# Altium PCB PCB1.PcbDoc
Units mil, origin at the board's own origin, x right, y up, seen from the top; angles counter-clockwise.
Board outline 1500 x 1080 mil, 2 copper layers (Top Layer, Bottom Layer); 17 components, 4 nets, 60 pads, 0 vias.
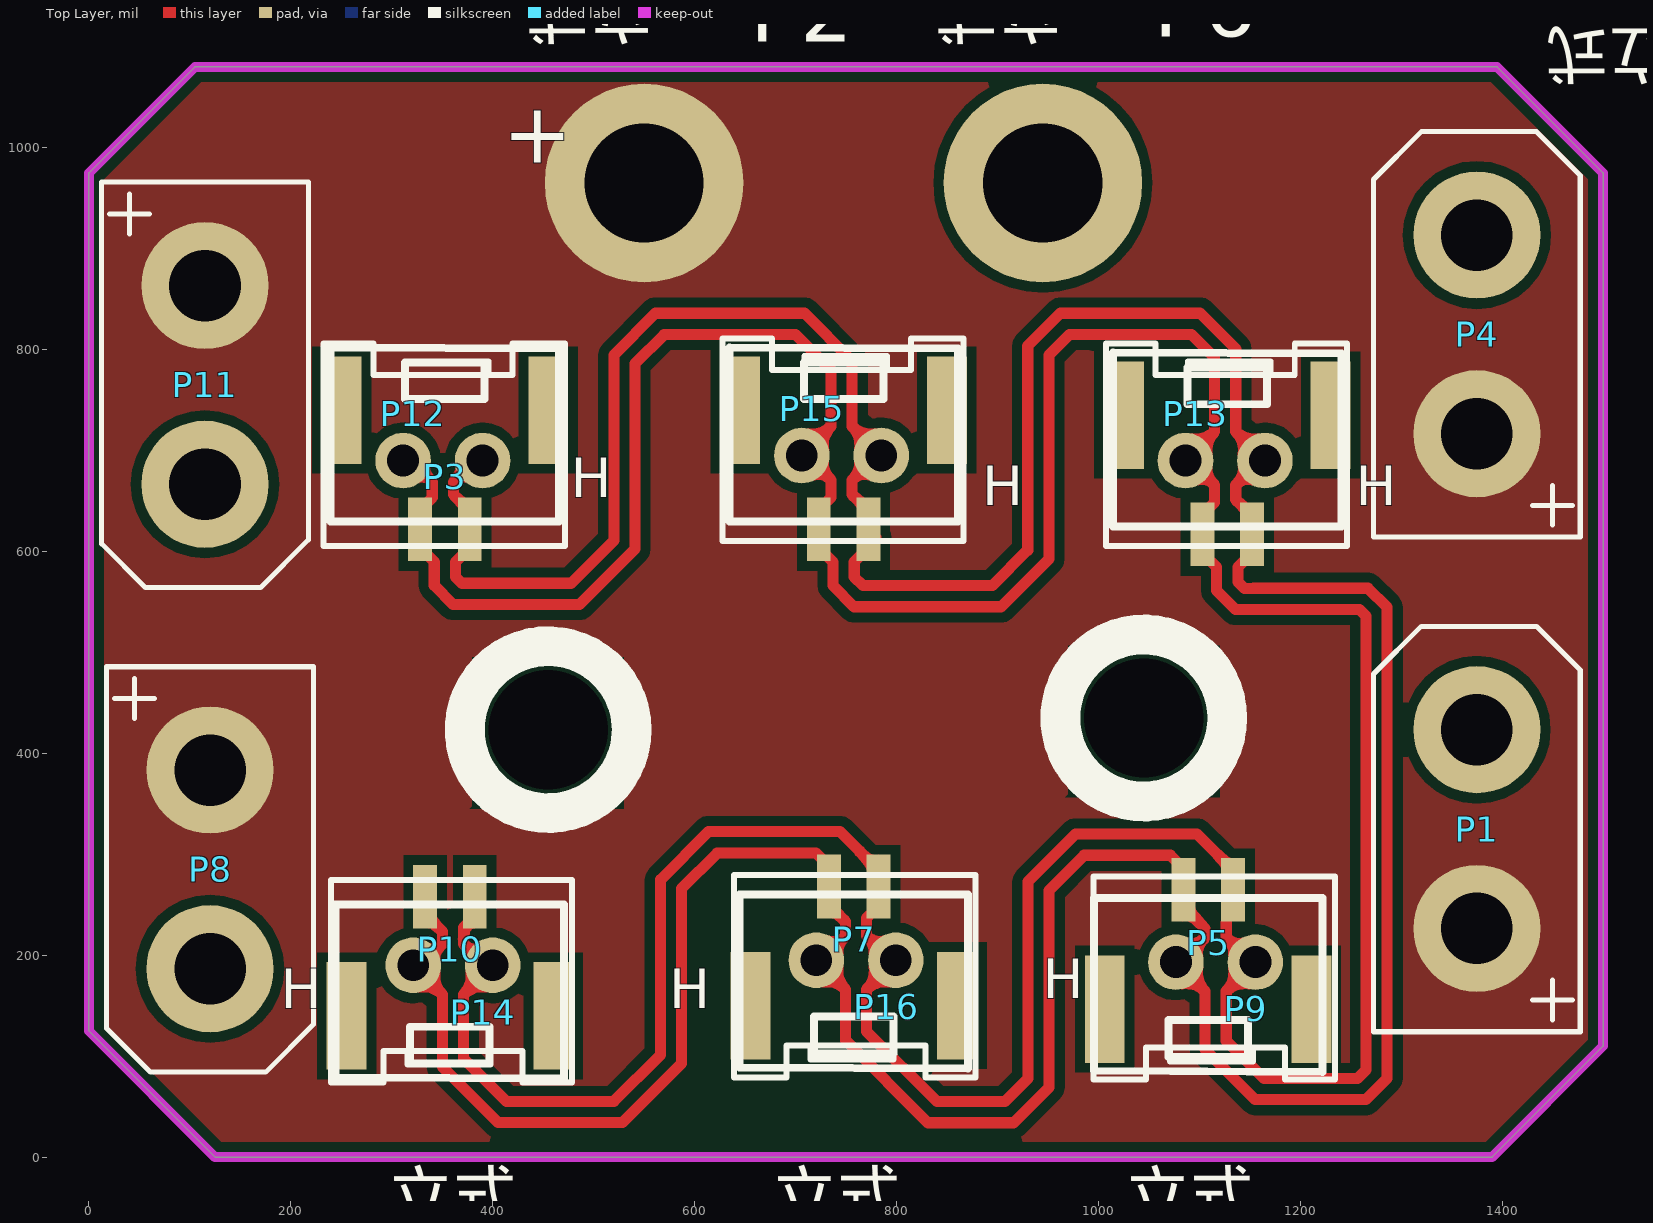
[diagram p0: Top Layer view]
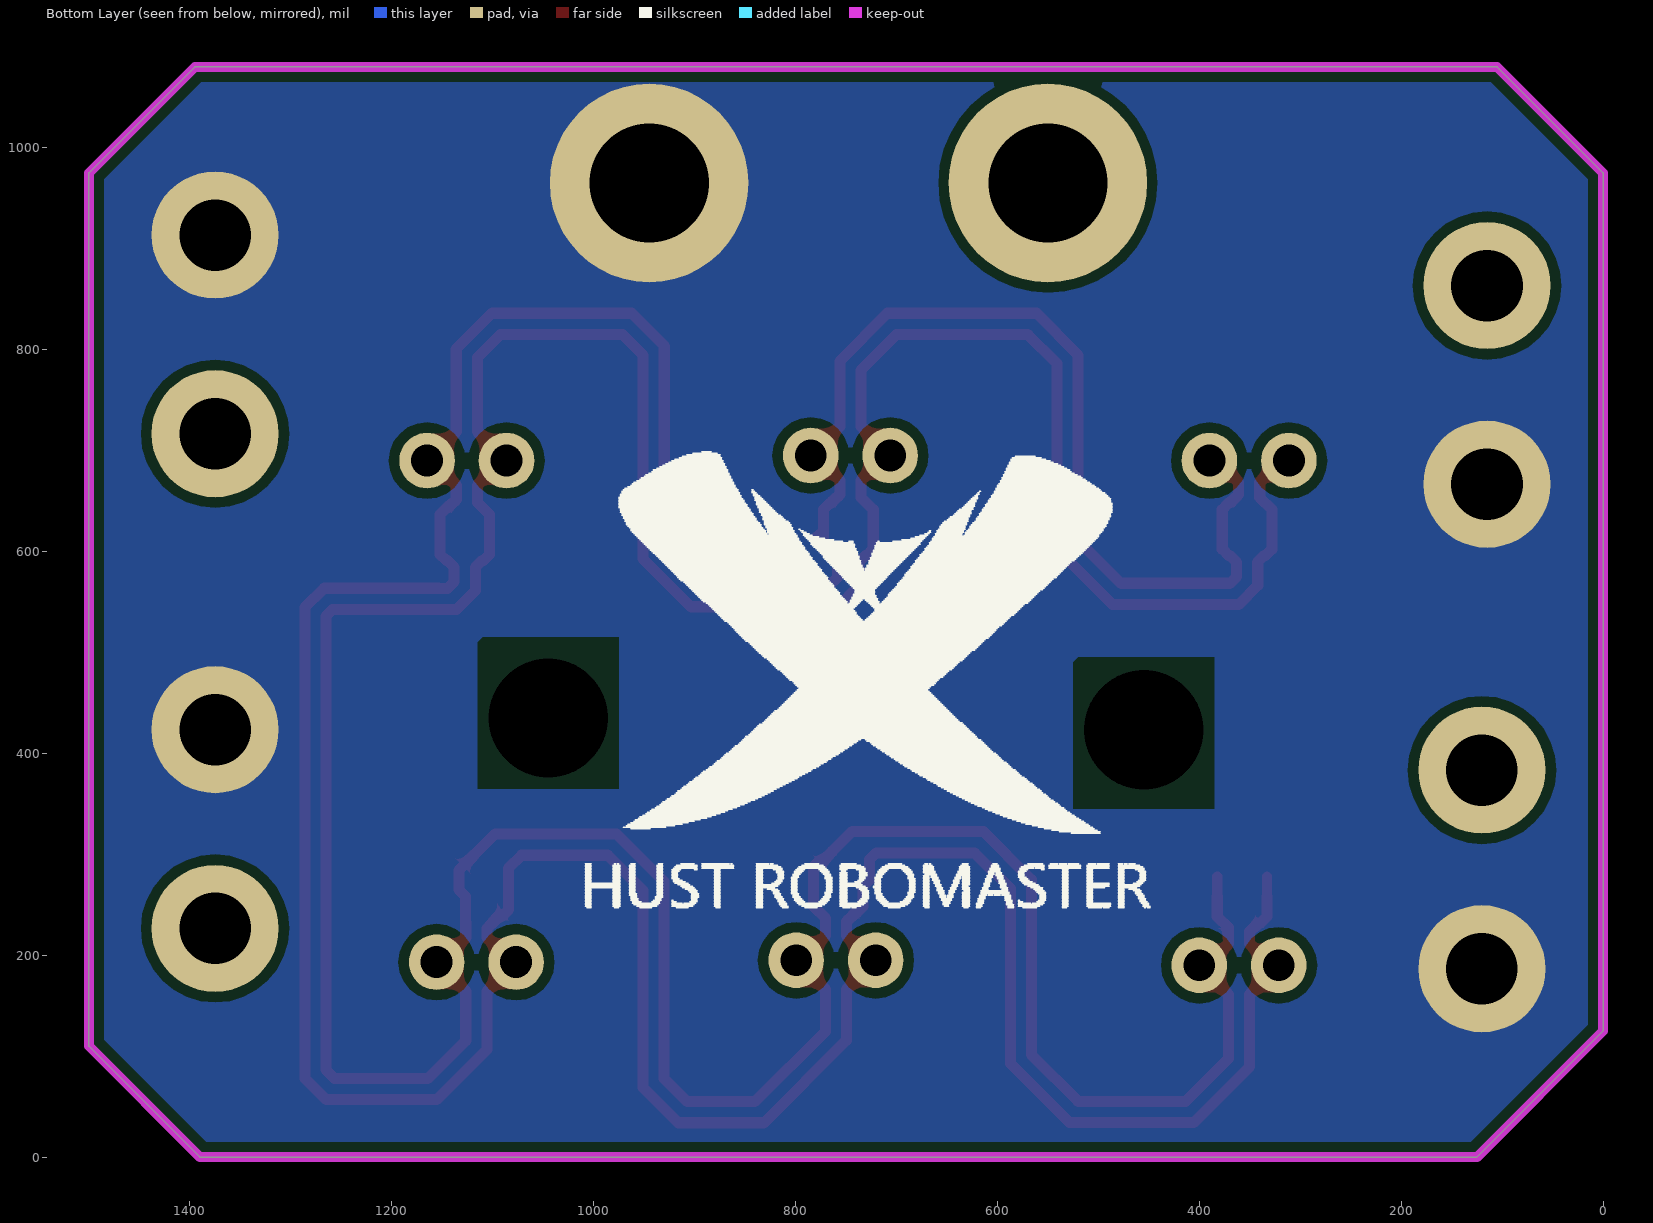
[diagram p1: Bottom Layer view, seen from below]
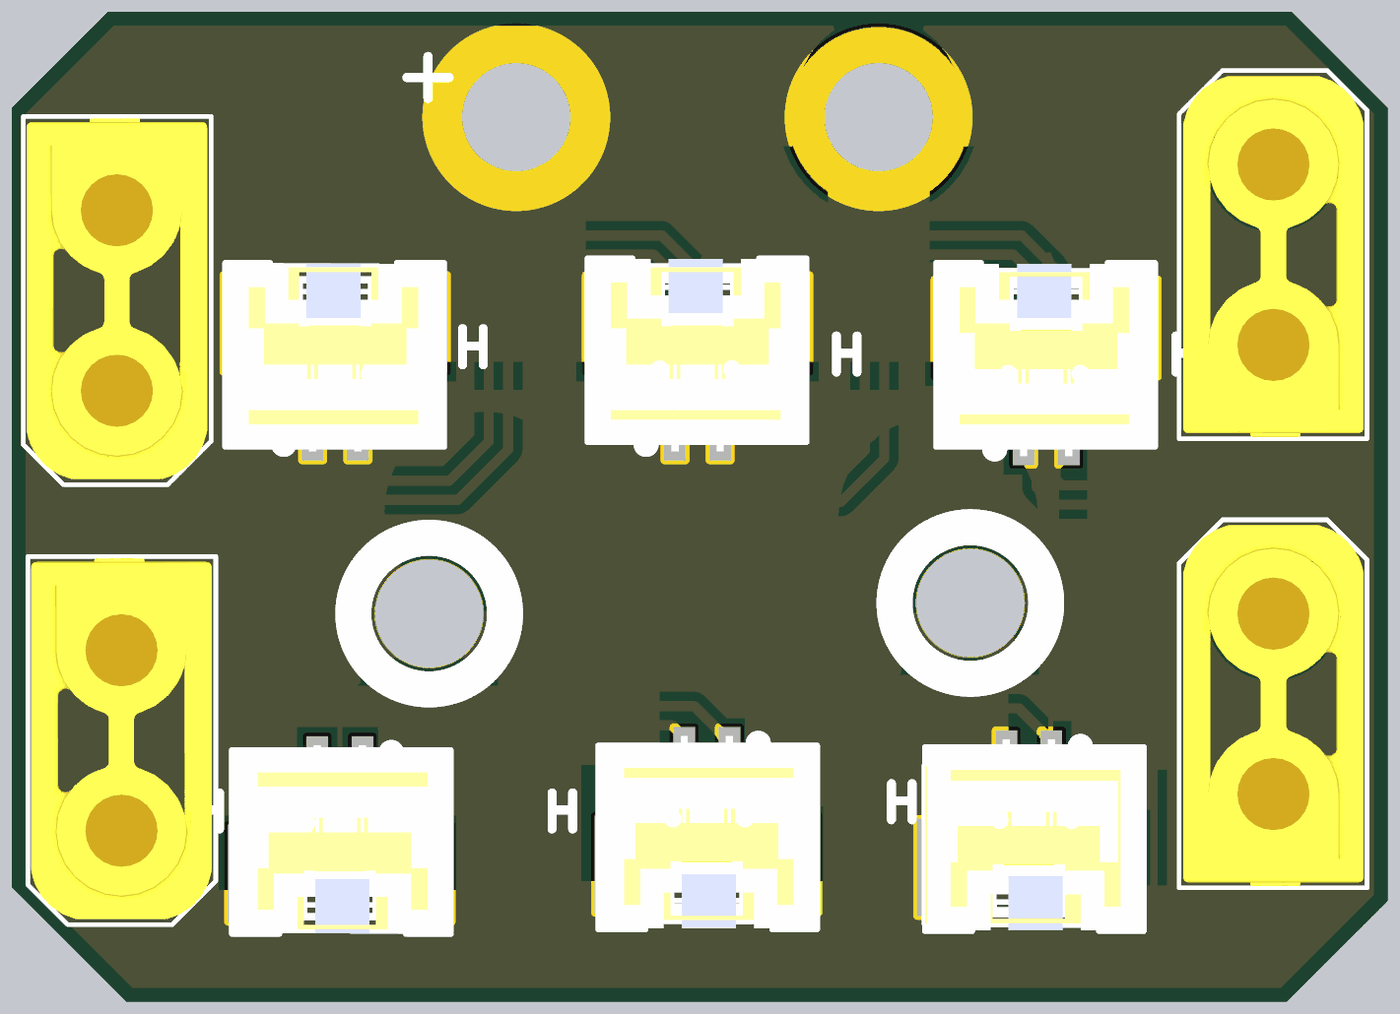
[diagram p2: 3D render of the assembled board from above, using the file's embedded part models]

## Layer stack, top to bottom
Top Solder: solder mask 0.4, Solder Resist, Dk 3.5
Top Layer: signal copper 1.4
Dielectric 1: dielectric 12.6, FR-4, Dk 4.8
Bottom Layer: signal copper 1.4
Bottom Solder: solder mask 0.4, Solder Resist, Dk 3.5

## Board outline
0,125 0,975 105,1080 1395,1080 1500,975 1500,110 1390,0 125,0

## Design rules (kind name [scope] priority, off if disabled: settings)
Clearance [All] p1: gap=10 ignorepadtopadclearanceinfootprint=FALSE except(0: Arc-Hole Track-Hole SMDPad-Hole THPad-Hole Via-Hole Fill-Hole Poly-Hole Region-Hole Text-Hole)
DiffPairsRouting [InDifferentialPair('NewDifferentialPair1')] p1: maxlimit=10 minlimit=10 mostfreqgap=10 toplayer_minwidth=11 toplayer_maxwidth=11 toplayer_prefwidth=11 bottomlayer_minwidth=11 bottomlayer_maxwidth=11 bottomlayer_prefwidth=11 maxuncoupledlength=500
PolygonConnect [All] p1: connectstyle=Direct reliefconductorwidth=10 reliefentries=4 polygonreliefangle="90 Angle" airgapwidth=10
RoutingVias [All] p1: holewidth=11.81 width=23.62 viastyle="Through Hole" minholewidth=7.87 minwidth=15.75 maxholewidth=28 maxwidth=50
SolderMaskExpansion [All] p1: expansion=4
Width [All] p1: maxlimit=10 minlimit=10 preferedwidth=10
29 further rules are at their usual default settings.

## Classes and differential pairs
component class Sheet2: P1 P2 P3 P4 P5 P6 P7 P8 P9 P11 P12 P13 P14 P15 P16
differential pair NewDifferentialPair1: +Can_H -Can_L

## Components (designator, comment, footprint, x,y, rotation, side; value= is the part's Value field where it differs from the comment)
P1 "XT30/60/90" XT30UPB-FEMALE 1375,325 r270 top
P2 "A1.25W-2F" GH1.25-2P-立贴 747.64,621.89 r180 top
P3 "A1.25W-2F" GH1.25-2P-立贴 352.64,621.89 r180 top
P4 "XT30/60/90" XT30UPB-FEMALE 1375,815 r270 top
P5 "A1.25W-2F" GH1.25-2P-立贴 1108.8,264.69 r0 top
P6 "A1.25W-2F" GH1.25-2P-立贴 1127.64,616.89 r180 top
P7 "A1.25W-2F" GH1.25-2P-立贴 757.64,268.11 r0 top
P8 "XT30/60/90" XT30UPB-FEMALE 120,285 r90 top
P9 "2pin_IO" "HY2.00MM 2X1_立式" 1116.16,193.15 r180 top
P10 "A1.25W-2F" GH1.25-2P-立贴 357.64,258.11 r0 top
P11 "XT30/60/90" XT30UPB-FEMALE 115,765 r90 top
P12 "2pin_IO" "HY2.00MM 2X1_立式" 350.63,690 r0 top
P13 "2pin_IO" "HY2.00MM 2X1_立式" 1125.63,690 r0 top
P14 "2pin_IO" "HY2.00MM 2X1_立式" 360.63,190 r180 top
P15 "2pin_IO" "HY2.00MM 2X1_立式" 745.63,695 r0 top
P16 "2pin_IO" "HY2.00MM 2X1_立式" 760,195 r180 top
? "RM_logo" "RM_logo 560mil*460" 730.69,480 r180 bottom

## Footprints (in the part's own frame and the unit in brackets; to place one, negate y for a bottom-side part, rotate by r counter-clockwise, add the part's x,y. Pads: shape width x height; smd on the part's side, far side on the other; paste and mask are expansions set on the pad)
GH1.25-2P-立贴 [mm]
  rect 1x2.7 smd: 0(-2.6,-3) 0(2.6,-3)
  round 0.7 on Top Overlay: 0(1.425,0.35)
  rect 0.6x1.6 smd: 1(0.625,0) 2(-0.625,0)
  silkscreen extent -2.88,-4.58 2.88,-0.2, body extent -2.88,-4.55 2.88,0.55, height 4.13
"HY2.00MM 2X1_立式" [mm] "额定电流2A，额定电压250V"
  round 0.7 on Top Overlay: 0(-2.51,2.35)
  round 1.4 hole 0.8: 1(-1,0) 2(1,0)
  silkscreen extent -3,-2.15 3.07,2.95, body extent -3,-2.17 3,2.93, height 8
"RM_logo 560mil*460" [mil] "560mil*460mil"
  silkscreen extent -278,-233 282,219
XT30UPB-FEMALE [mm]
  round 3.2 hole 1.8: 1(2.5,0) 2(-2.5,0)
  silkscreen extent -5.1,-2.6 5.1,2.6, body extent -4.95,-2.49 5.05,2.51, height 10

## Part data
P2 P3 P5 P6 P7 P10: library part GH1.25-2P

## Free pads (board coordinates)
  round 196.85 hole 118.11: 5(550,965) 6(945,965)
  round 0 hole 118.11: 7(1045,435) 8(455,423.43)

## Nets (pads, with @x,y where several pads share a name; then routed paths per layer and width w, separated by ;. In a path a pad name is that pad's centre, name@x,y a point inside that pad or via, vN(x,y) a via of type N, cw(c..) or ccw(c..) an arc to the next point about the centre after c; other vN are vias at no path point)
Can_H: P2.2 P3.2 P5.2 P6.2 P7.2 P9.2 P10.2 P12.2 P13.2 P14.2 P15.2 P16.2 | length 4644.3
  Top Layer w10: P10.2 P10.2@333.03,277.8 ; P2.2@777.24,616.89 P2.2@780,614.13
  Top Layer w11: P10.2 333.03,238.43 339.34,232.11 341.45,232.11 350.13,223.44 350.13,211.11 329.02,190 P14.2 350.13,161.13 350.13,89.22 405.23,34.12 528.58,34.12 587.06,92.59 587.06,266.06 622.47,301.47 720.28,301.47 726.72,295.02 726.72,274.42 P7.2 733.03,248.43 739.34,242.11 740.69,242.11 749.5,233.31 749.5,219.33 725.17,195 P16.2 749.5,166.13 749.5,115.8 831.3,34 916.1,34 951.15,69.05 951.15,264.22 985.93,299 1071.44,299 1084.19,286.25 P5.2 1084.19,245 1090.5,238.69 1093.56,238.69 1105.66,226.59 1105.66,217.48 1081.34,193.15 P9.2 1105.66,164.28 1105.66,106.62 1155.35,56.93 1265.18,56.93 1286,77.75 1286,544.75 1267.25,563.5 1153.8,563.5 1153.75,563.45 1144.58,563.45 1138.14,569.89 1138.14,584.45 1144.58,590.89 1145.93,590.89 1152.24,597.2 P6.2 1152.24,636.57 1145.93,642.89 1144.58,642.89 1136.13,651.34 1136.13,665.67 1160.46,690 P13.2 1136.13,718.87 1136.13,800.73 1100.86,836 962.6,836 930,803.4 930,601.2 895,566.2 766.84,566.2 758.14,574.89 758.14,589.45 764.58,595.89 765.93,595.89 772.24,602.2 P2.2 772.24,641.57 765.93,647.89 764.58,647.89 756.13,656.34 756.13,670.67 780.46,695 P15.2 756.13,723.87 756.13,788.57 708.7,836 561.3,836 520,794.7 520,611 477.45,568.45 369.58,568.45 363.14,574.89 363.14,589.45 369.58,595.89 370.93,595.89 377.24,602.2 P3.2 377.24,641.57 370.93,647.89 369.58,647.89 361.13,656.34 361.13,668.89 382.24,690 P12.2
  Bottom Layer w10: P14.2@321.26,187.29 P14.2 ; P16.2@720.32,194.68 P16.2
Can_L: P2.1 P3.1 P5.1 P6.1 P7.1 P9.1 P10.1 P12.1 P13.1 P14.1 P15.1 P16.1 | length 4594.8
  Top Layer w10: P10.1 P10.1@382.24,277.8
  Top Layer w11: P12.1 319.02,690 340.13,668.89 340.13,653.67 328.03,641.57 P3.1 328.03,602.2 334.34,595.89 335.69,595.89 342.14,589.45 342.14,566.2 360.88,547.45 486.15,547.45 541,602.3 541,786 570,815 700,815 735.13,779.87 735.13,723.87 P15.1 710.8,695 735.13,670.67 735.13,653.67 723.03,641.57 P2.1 723.03,602.2 729.34,595.89 730.69,595.89 737.14,589.45 737.14,566.2 758.14,545.2 903.7,545.2 951,592.5 951,794.7 971.3,815 1092.17,815 1115.13,792.04 1115.13,718.87 P13.1 1090.8,690 1115.13,665.67 1115.13,648.67 1103.03,636.57 P6.1 1103.03,597.2 1109.34,590.89 1110.69,590.89 1117.14,584.45 1117.14,561.2 1135.88,542.45 1162.45,542.45 1162.5,542.5 1258.56,542.5 1265,536.06 1265,86.44 1256.48,77.93 1164.05,77.93 1126.66,115.31 1126.66,164.28 P9.1 1150.99,193.15 1126.66,217.48 1126.66,232.25 1127.09,232.68 1127.09,258.37 P5.1 1133.41,284.37 1097.78,320 977.23,320 930.15,272.92 930.15,77.75 907.41,55 840,55 770.5,124.5 770.5,166.13 P16.1 794.83,195 770.5,219.33 770.5,236.68 782.24,248.43 P7.1 782.24,287.8 775.93,294.11 772.26,294.11 743.9,322.47 613.77,322.47 566.06,274.75 566.06,101.29 519.88,55.12 413.93,55.12 371.13,97.92 371.13,161.13 P14.1 392.24,190 371.13,211.11 371.13,227.31 382.24,238.43 P10.1
  Bottom Layer w10: P16.1 P16.1@802.39,191.98
GND: P1.2 P4.2 P8.2 P11.2 pad.6
VCC: P1.1 P4.1 P8.1 P11.1 pad.5
pads on no net: P2.0 P3.0 P5.0 P6.0 P7.0 P9.0 P10.0 P12.0 P13.0 P14.0 P15.0 P16.0

## Polygon pours and split planes (outlines as drawn)
GND on Bottom Layer "Bottom Layer-GND 1" (solid, remove dead copper, pour order 6): 105,1080 0,975 0,125 120,5 1385,5 1390,0 1500,110 1500,965 1510,975 1405,1080
GND on Bottom Layer "Bottom Layer-GND" (solid, shelved, pour order 2): 0,975 0,125 125,0 1390,0 1500,110 1500,975 1395,1080 105,1080
VCC on Top Layer "Top Layer-VCC 1" (solid, remove dead copper, pour order 4): 105,1080 0,975 0,125 125,0 1390,0 1500,110 1500,975 1395,1080
VCC on Top Layer "Top Layer-VCC" (solid, shelved, pour order 0): 0,975 0,125 125,0 1390,0 1500,110 1500,975 1395,1080 105,1080

## Keep-outs
Keep-Out Layer:
  the board outline again, w10

## Other copper
Top Layer:
  pour cut-out: 970,506.57 970,359.33 967.24,356.57 1120,356.57 1120,506.57
  pour cut-out: 380,495 380,347.76 377.24,345 530,345 530,495
  pour cut-out: 455,423.43
Bottom Layer:
  pour cut-out: 975,515 975,365 1115,365 1115,510 1110,515
  pour cut-out: 385,495 385,345 525,345 525,490 520,495

## Silkscreen, mask and mechanical layers (free items; w line width, h text height)
Top Overlay:
  circle w39.37: c1045,435 r82.68
  circle w39.37: c455,423.43 r82.68
  text "+" at 410,985 h60
  text "H" at 477.45,653.67 h39.37
  text "H" at 885,645.71 h39.37
  text "H" at 1255,645.71 h39.37
  text "H" at 945,157.28 h39.37
  text "H" at 190,147.28 h39.37
  text "H" at 575,147.28 h39.37

## Text inside footprints (layer, text, board x,y; h text height)
P2: Top Overlay "立式" at 965,1170 h80 r180
P3: Top Overlay "立式" at 560,1170 h80 r180
P5: Top Overlay "立式" at 1026.81,-75 h80
P6: Top Overlay "立式" at 1570,1130 h80 r180
P7: Top Overlay "立式" at 676.73,-75 h80
P10: Top Overlay "立式" at 296.54,-75 h80